# Allegro board board6DFfils6Fini.brd
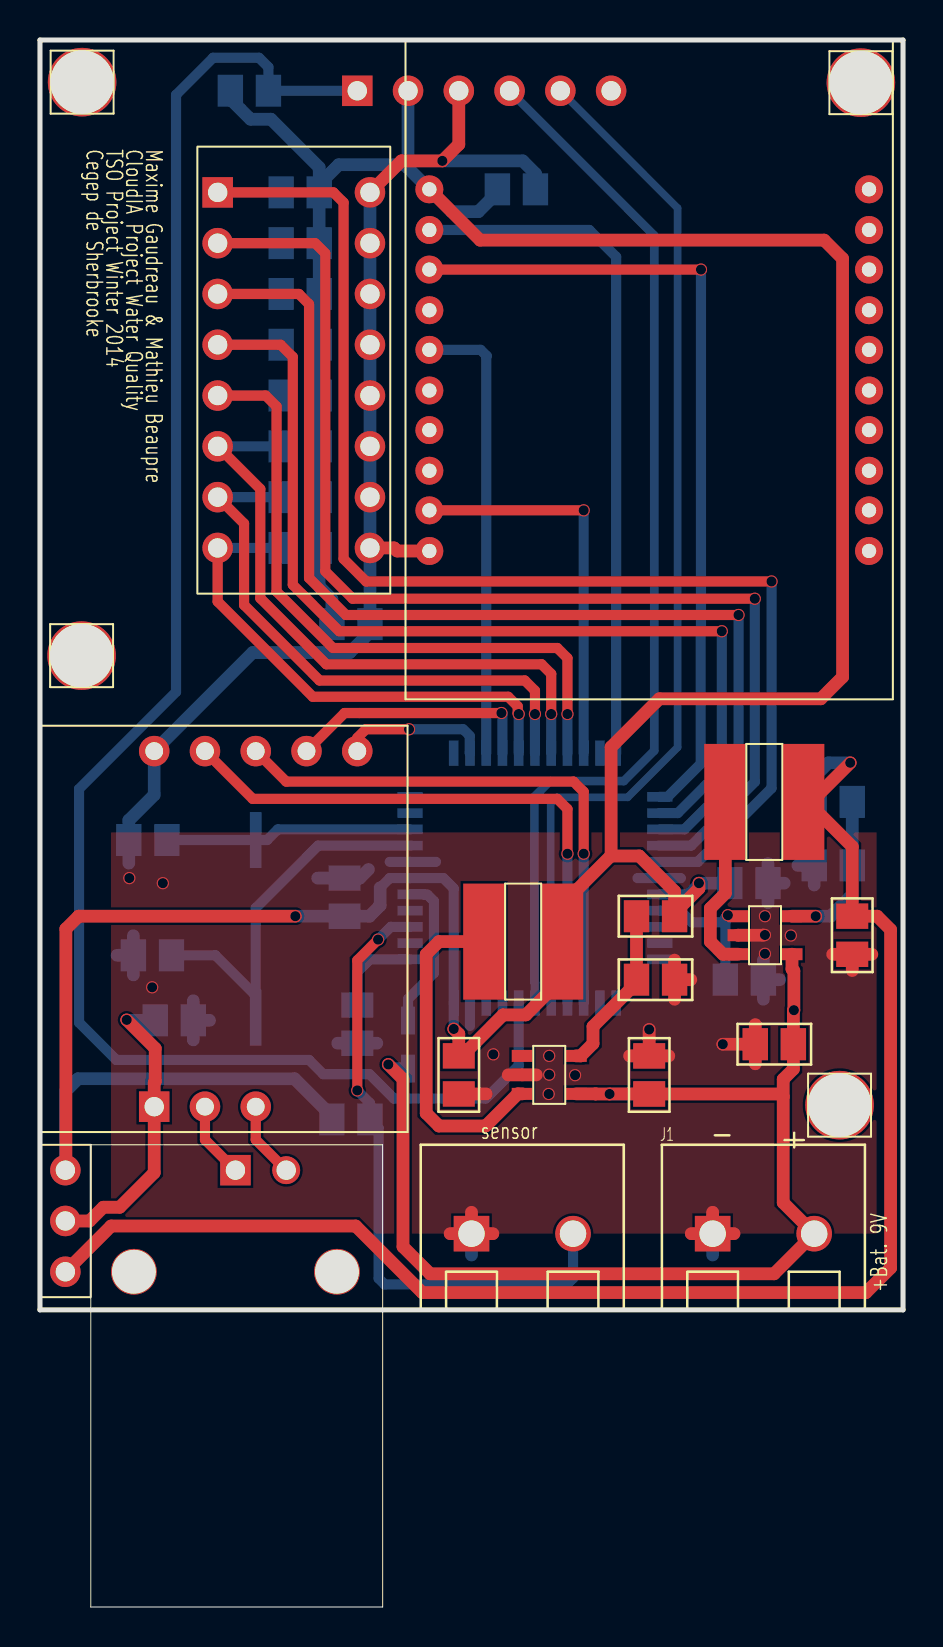
[diagram p0: board, top side]
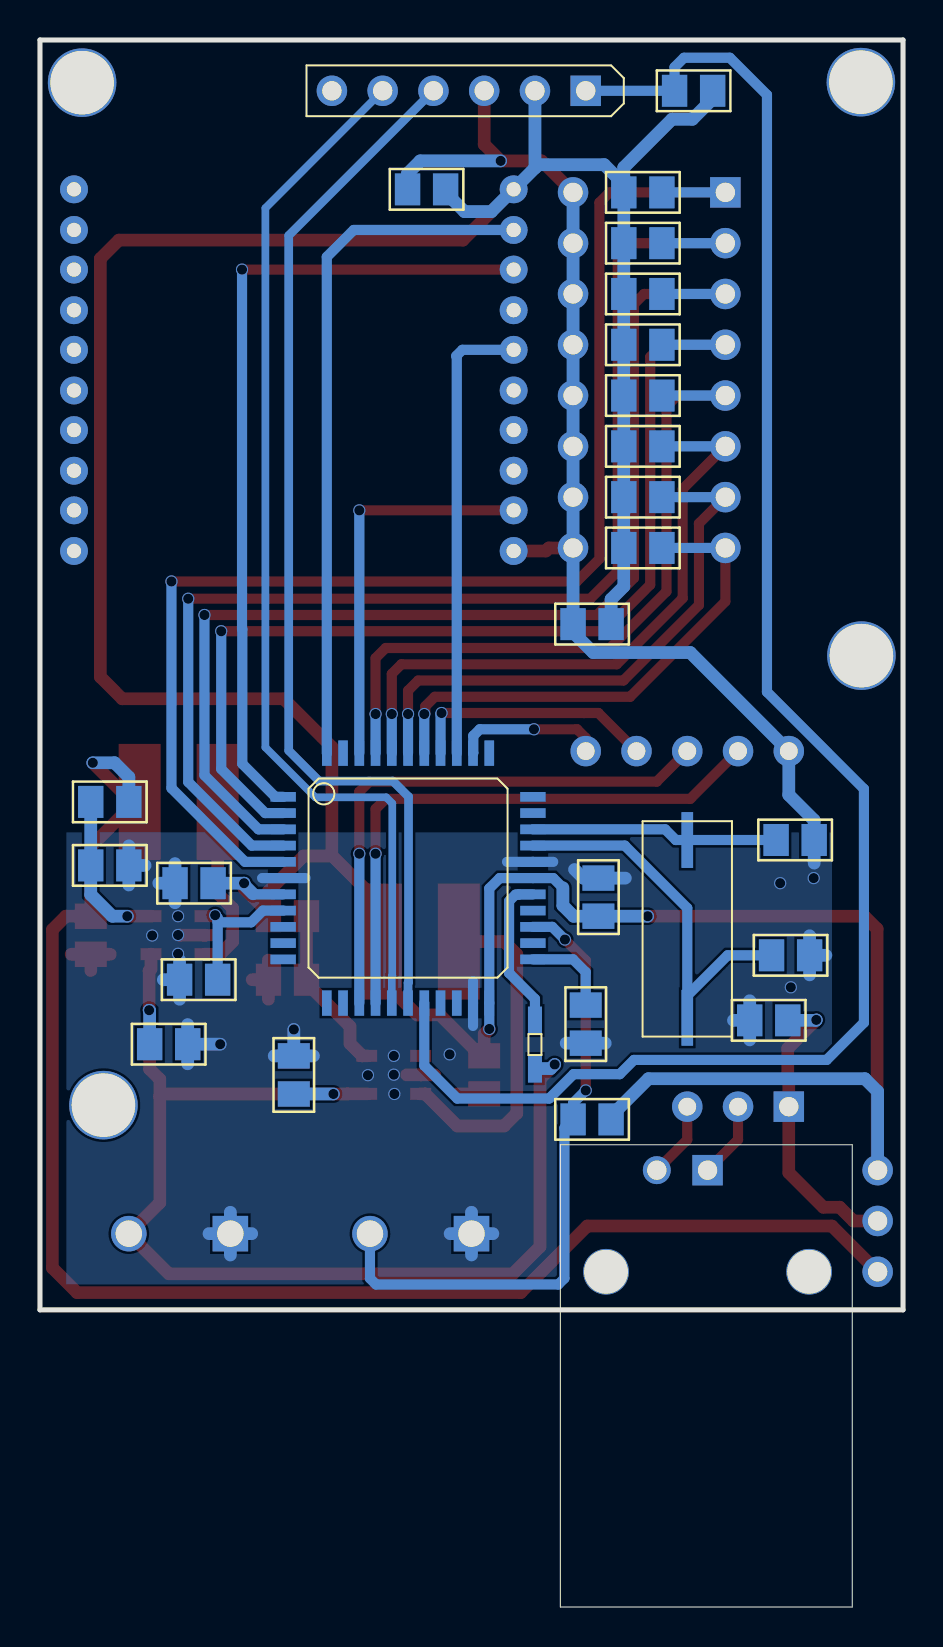
[diagram p1: board, bottom side, seen from below]

Outline 43.18 x 78.36 mm; copper layers: TOP, BOTTOM. Coordinates in mm from the lower left corner of the outline.
Outline path: 0,78.36 0,14.86 43.18,14.86 43.18,78.36 0,78.36

## Design rules (mm)
nets with their own width: min track width 0.381; nets N45221 N45265
nets with their own width: min track width 0.508; nets CAPTEURRX CAPTEURTX CELL7 CELL8 ENABLE POWER5V N45185 N45305 N56544 N56546 N56548 N56550 N56552 N56554 N56556 N56558 N61373 N61405 N78069 N78169 N81598 N94966 XBEEDIN XBEEDOUT XBEERESET XBEESLEEP
nets with their own width: min track width 0.635; nets 3.3V 5V 6A9V(PILE) GND N61433 N82912 N83047 N88127 N88155

## Placement (name value [footprint] x y rotation side)
3.3V  Vz 6V  [DIODESOD323]  18.41 26.92 90 bottom
+BAT. 9V  HEADER 2  [CONNECTEUR_2_200]  33.65 18.67 0 top
C1  10uF  [C_0805]  35.79 28.14 0 bottom
C2  100nF  [C_0805]  35.79 28.14 0 top
C3  10uF  [C_0805]  40.64 32.64 90 top
C4  10uF  [C_0805]  30.48 27.56 270 top
C5  100nF  [C_0805]  30.48 27.56 270 bottom
C6  22uF  [C_0805]  20.96 25.65 90 top
C7  10uF  [C_0805]  14.61 49.15 0 bottom
C8  100uF  [C_0805]  22.89 70.89 0 bottom
C9  27pF  [C_0805]  4.67 32.59 0 bottom
C10  27pF  [C_0805]  4.44 38.35 0 bottom
C11  10uF  [C_0805]  15.88 30.1 270 bottom
C12  0.1 uF  [C_0805]  15.24 34.54 90 bottom
C13  0.1 uF  [C_0805]  34.52 36.2 0 bottom
C14  10uF  [C_0805]  5.77 29.34 0 bottom
J2  HEADER 3  [JUMPER3]  1.27 16.76 90 top
J3  Convertion Board  [CONDUCTIVITY_SENSOR]  0 23.75 90 top
J4  BNC au capteur  [CONNECTEUR_BNC]  2.54 23.11 270 top
J6  Connecteur PicKit  [SIP6]  15.88 75.82 270 bottom
J7  contact eau  [CONNECTEUR_2_200]  21.59 18.67 0 top
L1  10uH  [BOBINE10U100MH]  34.29 40.26 0 top
L2  10uH  [BOBINE10U100MH]  22.23 33.27 0 top
NOREF  -  [unnamed]  2.08 47.57 270 top
NOREF#2  -  [unnamed]  2.11 76.25 270 top
NOREF#3  -  [unnamed]  40 25.1 270 top
NOREF#4  -  [unnamed]  41.07 76.23 270 top
R1  105K  [R_0805]  40.64 40.26 180 bottom
R2  ?  [R_0805]  36.2 31.37 180 bottom
R3  20K  [R_0805]  38.73 37.08 0 bottom
R4  61.9K  [R_0805]  29.84 34.54 0 top
R5  20K  [R_0805]  31.75 31.37 180 top
R6  4.7K  [R_0805]  9.53 75.82 0 bottom
R7  10K  [R_0805]  16.51 24.38 180 bottom
R8  10K  [R_0805]  12.07 70.74 0 bottom
R9  10K  [R_0805]  12.07 68.2 0 bottom
R10  10K  [R_0805]  12.07 65.66 0 bottom
R11  10K  [R_0805]  12.07 63.12 0 bottom
R12  10K  [R_0805]  12.07 60.58 0 bottom
R13  10K  [R_0805]  12.07 58.04 0 bottom
R14  10K  [R_0805]  12.07 55.5 0 bottom
R15  10K  [R_0805]  12.07 52.96 0 bottom
SW1  SW DIP-8  [DIPSWITCH]  8.89 70.74 0 top
U1  LM104/TO  [TPS560200]  34.92 34.54 0 top
U2  LM104/TO  [TPS560200]  24.13 27.56 0 top
U3  PIC18F47J13  [PQFP44]  24.77 36.45 180 bottom
U4  Xbee  [XBEE]  30.48 61.85 0 top
Y1  4Mhz CRYSTAL  [CRYSTAL_SMD]  10.79 33.91 270 bottom

## Library data of the parts
3.3V = DIODE ZENER
+BAT. 9V = HEADER 2_1
C1-C6 C14 = C
C7-C11 = CAPACITOR NON-POL
C12 C13 = CAP NP
J2 = HEADER 3
J3 = HEADER 3X2_3
J4 = BNC
J6 = HEADER 6_0
J7 = HEADER 2
L1 L2 = INDUCTOR
R1-R5 R7-R15 = R
R6 = RESISTOR
SW1 = SW DIP-8: User Part Number: ***
U1 U2 = LM104/TO_3
U3 = PIC16C67_2
U4 = HEADER 11X2_1
Y1 = CRYSTAL

## Footprints (pads in the part's own frame, mm; a bottom-side part is the same pattern mirrored in y, then rotated)
BOBINE10U100MH
  rect 2.1x5.8 smd: 1(0,0) 2(3.9,0)
C_0805
  rect 1.27x1.6 smd: 1(0,0) 2(1.905,0)
CONDUCTIVITY_SENSOR
  rect 1.524x1.524 hole 0.965: 1(1.27,-5.715)
  round 1.524 hole 0.889: 2(1.27,-8.255) 3(1.27,-10.795) 4(19.05,-5.715) 5(19.05,-8.255) 6(19.05,-10.795) 7(19.05,-13.335) 8(19.05,-15.875)
CONNECTEUR_2_200
  rect 1.778x1.778 hole 1.321: 1(0,0)
  round 1.778 hole 1.321: 2(5.08,0)
CONNECTEUR_BNC
  round 2.286 hole 2.184: (6.35,12.319) (6.35,2.159)
  rect 1.524x1.524 hole 0.965: 1(1.27,7.239)
  round 1.397 hole 0.965: 2(1.27,9.779)
CRYSTAL_SMD
  rect 2.794x0.584 smd: 1(-4.445,0) 2(4.445,0)
DIODESOD323
  rect 1.4x0.7 smd: 1(0,0) 2(2.4,0)
DIPSWITCH
  rect 1.524x1.524 hole 0.965: 1(0,0)
  round 1.524 hole 0.965: 2(0,-2.54) 3(0,-5.08) 4(0,-7.62) 5(0,-10.16) 6(0,-12.7) 7(0,-15.24) 8(0,-17.78) 9(7.62,-17.78) 10(7.62,-15.24) 11(7.62,-12.7) 12(7.62,-10.16) 13(7.62,-7.62) 14(7.62,-5.08) 15(7.62,-2.54) 16(7.62,0)
JUMPER3
  round 1.524 hole 0.965: 1(0,0) 2(2.54,0) 3(5.08,0)
PQFP44
  rect 1.27x0.483 smd: 1(-6.248,4.064) 2(-6.248,3.251) 3(-6.248,2.438) 4(-6.248,1.626) 5(-6.248,0.813) 6(-6.248,0) 7(-6.248,-0.813) 8(-6.248,-1.626) 9(-6.248,-2.438) 10(-6.248,-3.251) 11(-6.248,-4.064) 23(6.248,-4.064) 24(6.248,-3.251) 25(6.248,-2.438) 26(6.248,-1.626) 27(6.248,-0.813) 28(6.248,0) 29(6.248,0.813) 30(6.248,1.626) 31(6.248,2.438) 32(6.248,3.251) 33(6.248,4.064)
  rect 0.483x1.27 smd: 12(-4.064,-6.248) 13(-3.251,-6.248) 14(-2.438,-6.248) 15(-1.626,-6.248) 16(-0.813,-6.248) 17(0,-6.248) 18(0.813,-6.248) 19(1.626,-6.248) 20(2.438,-6.248) 21(3.251,-6.248) 22(4.064,-6.248) 34(4.064,6.248) 35(3.251,6.248) 36(2.438,6.248) 37(1.626,6.248) 38(0.813,6.248) 39(0,6.248) 40(-0.813,6.248) 41(-1.626,6.248) 42(-2.438,6.248) 43(-3.251,6.248) 44(-4.064,6.248)
R_0805
  rect 1.27x1.6 smd: 1(0,0) 2(1.905,0)
SIP6
  rect 1.524x1.524 hole 0.965: 1(0,0)
  round 1.524 hole 0.965: 2(0,-2.54) 3(0,-5.08) 4(0,-7.62) 5(0,-10.16) 6(0,-12.7)
TPS560200
  rect 1.05x0.6 smd: 1(0,0) 2(0,-0.95) 3(0,-1.9) 4(2.7,-1.9) 5(2.7,0)
unnamed
  round 3.429 hole 3.175: 1(0,0)
XBEE
  round 1.397 hole 0.711: 1(-10.998,9.042) 2(-10.998,7.01) 3(-10.998,5.029) 4(-10.998,2.997) 5(-10.998,1.016) 6(-10.998,-1.016) 7(-10.998,-2.997) 8(-10.998,-5.029) 9(-10.998,-7.01) 10(-10.998,-9.042) 11(10.998,-9.042) 12(10.998,-7.01) 13(10.998,-5.029) 14(10.998,-2.997) 15(10.998,-1.016) 16(10.998,1.016) 17(10.998,2.997) 18(10.998,5.029) 19(10.998,7.01) 20(10.998,9.042)

## Nets
3.3V: C6.2 C7.1 C8.1 C12.1 C13.1 J2.3 J6.2 L2.2 R4.2 R6.1 R7.2 R8.2 R9.2 R10.2 R11.2 R12.2 R13.2 R14.2 R15.2 U3.7(VDD1) U3.22(RA3) U3.28(VDD2) U4.1
5V: C3.2 J2.1 L1.2 R1.2
GND: +BAT. 9V.1 C1.1 C2.1 C3.1 C4.1 C5.1 C6.1 C7.2 C8.2 C9.1 C10.1 C11.2 C12.2 C13.2 C14.2 J3.4(GND) J6.3 J7.1 R2.1 R3.1 R5.1 SW1.9(B8) SW1.10(B7) SW1.11(B6) SW1.12(B5) SW1.13(B4) SW1.14(B3) SW1.15(B2) SW1.16(B1) U1.2(GND) U2.2(GND) U3.6(VSS1) U3.21(RA2) U3.29(VSS2) U4.10
6A9V(PILE): 3.3V.1(CATHODE) +BAT. 9V.2 C1.2 C2.2 C4.2 C5.2 U1.4(VIN) U2.4(VIN)
CAPTEURRX: J3.6 U3.14(RB4)
CAPTEURTX: J3.5 U3.15(RB5)
CELL7: J3.8 U3.35(RC1)
CELL8: J3.7 U3.37(RC3/SCL1)
ENABLE POWER5V: R2.2 U1.1(EN) U3.8(RB0)
XBEEDIN: U3.1(RC7) U4.3
XBEEDOUT: U3.44(RC6) U4.2
XBEERESET: U3.36(RC2) U4.5
XBEESLEEP: U3.42(RC4/SDA1/SDI) U4.9
N45185: C11.1 U3.23(VDDCORE)
N45221: J6.5 U3.16(RB6)
N45265: J6.4 U3.17(RB7)
N45305: J6.1 R6.2 U3.18(M\C\L\R\)
N56544: R8.1 SW1.1(A1) U3.5(RD7)
N56546: R9.1 SW1.2(A2) U3.4(RD6)
N56548: R10.1 SW1.3(A3) U3.3(RD5)
N56550: R11.1 SW1.4(A4) U3.2(RD4)
N56552: R12.1 SW1.5(A5) U3.41(RD3)
N56554: R13.1 SW1.6(A6) U3.40(RD2)
N56556: R14.1 SW1.7(A7) U3.39(RD1/SDA2)
N56558: R15.1 SW1.8(A8) U3.38(RD0/SCL2)
N61373: J3.2 J4.1(CENTER)
N61405: J3.3 J4.2(SHIELD)
N61433: C14.1 J2.2 J3.1
N78069: C9.2 U3.30(OSC1/RA7) Y1.2
N78169: C10.2 U3.31(OSC2/RA6) Y1.1
N81598: 3.3V.2(ANODE) U3.27(RE2)
N82912: R4.1 R5.2 U2.5(VSENSE)
N83047: L2.1 U2.3(PH)
N88127: R1.1 R3.2 U1.5(VSENSE)
N88155: L1.1 U1.3(PH)
N94966: J7.2 R7.1 U3.25(RE0)

Pads without a net: J6 6; NOREF 1; NOREF#2 1; NOREF#3 1; NOREF#4 1; U2 1; U3 9 10 11 12 13 19 20 24 26 32 33 34 43; U4 4 6 7 8 11 12 13 14 15 16 17 18 19 20

## Via types
v1: diameter 0.61, hole 0.508, TOP to BOTTOM, 41 vias

## Routing (per net, layer and track width the routed paths; a pad name or vN(x,y) marks a point on that pad's centre or on a via; arc(x,y) is an arc through that point)
3.3V: length 190.7
  TOP w0.635: R4.2 31.75,34.71 ; 31.75,34.71 32.97,35.93 v1(32.97,36.2) ; 31.75,34.71 31.75,35.79 29.98,37.56 28.56,37.56 ; v1(12.78,34.54) 1.93,34.54 1.3,33.91 1.3,21.87 J2.3 ; 28.56,37.56 28.57,37.57 28.57,43 30.99,45.42 39.07,45.42 40.16,46.51 40.16,67.43 39.23,68.35 22.02,68.35 U4.1 ; 28.56,37.56 26.12,35.12 L2.2 26.12,31.42 24.31,29.61 23.17,29.61 21.12,27.56 C6.2 20.96,28.65 v1(20.7,28.91)
  BOTTOM w0.508: 17.02,35.97 17.5,36.45 U3.28 20.18,36.45 20.7,35.93 U3.22 v1(20.7,28.91) ; U3.7 32.49,35.64 32.52,35.67
  BOTTOM w0.635: R7.2 14.61,24.55 12.74,26.42 1.91,26.42 1.27,25.78 J2.3 ; C13.1 v1(32.97,36.2) 32.97,36.11 32.52,35.67 ; J6.2 18.41,71.96 ; 18.41,71.96 U4.1 20.6,69.78 21.94,69.78 22.89,70.73 C8.1 ; 18.41,71.96 18.25,72.12 14.95,72.12 13.97,71.15 ; v1(12.78,34.54) C12.1 16.48,34.54 17.02,35.08 17.02,35.97 ; R6.1 9.53,75.41 10.54,74.4 11.56,74.4 13.97,71.98 13.97,71.15 ; 13.97,71.15 R8.2 R9.2 R10.2 R11.2 R12.2 R13.2 R14.2 R15.2 13.97,51.03 14.61,50.39 C7.1
5V: length 76.4
  TOP w0.635: 38.4,40.26 38.58,40.26 v1(40.54,42.21) ; 38.4,40.26 L1.2 ; 38.4,40.26 40.64,38.02 C3.2 41.88,34.54 42.56,33.87 42.56,16.96 41.33,15.72 19.13,15.72 15.8,19.05 3.56,19.05 J2.1
  BOTTOM w0.635: R1.2 38.73,41.5 39.45,42.21 v1(40.54,42.21)
GND: length 121.7
  TOP w0.635: 39.66,32.64 C3.1 ; C3.1 40.64,31.83 ; C3.1 41.62,32.64 ; 23.43,26.61 U2.2 24.83,26.61 ; 29.5,27.56 C4.1 ; C4.1 v1(30.48,28.88) ; C4.1 31.46,27.56 ; R5.1 31.75,32.35 ; R5.1 31.75,30.39 ; R5.1 32.56,31.37 ; J7.1 21.59,19.74 ; J7.1 20.52,18.67 ; J7.1 22.66,18.67 ; C2.1 35.79,29.12 ; C2.1 35.79,27.16 ; C2.1 v1(34.16,28.14) ; SW1.16 18.08,72.31 v1(20.13,72.31) 20.96,73.14 J6.3 ; 36.2,33.6 36.18,33.59 U1.2 ; +BAT. 9V.1 34.72,18.67 ; +BAT. 9V.1 32.59,18.67 ; +BAT. 9V.1 33.65,19.74 ; C6.1 22.33,25.65 ; U4.10 17.87,52.81 17.72,52.96 SW1.9
  BOTTOM w0.508: 19.81,37.26 U3.29 17.5,37.26 ; 32.07,36.45 U3.6 29.9,36.45 ; 21.51,29.06 U3.21 21.51,31.29
  BOTTOM w0.635: 7.67,28.36 C14.2 ; C14.2 7.67,30.32 ; C14.2 8.48,29.34 ; 32.59,18.67 +BAT. 9V.1 ; +BAT. 9V.1 33.65,17.6 ; +BAT. 9V.1 33.65,19.74 ; +BAT. 9V.1 34.72,18.67 ; J7.1 22.66,18.67 ; J7.1 21.59,19.74 ; J7.1 21.59,17.6 ; J7.1 20.52,18.67 ; C13.2 36.42,37.17 ; C13.2 36.42,35.22 ; C13.2 37.24,36.2 ; 14.9,28.19 C11.2 16.85,28.19 ; R3.1 38.73,38.06 ; R3.1 37.92,37.08 ; R3.1 38.73,36.11 ; R2.1 37.01,31.37 ; R2.1 36.2,32.35 ; R2.1 36.2,30.39 ; C8.2 24.79,71.68 24.16,72.31 v1(20.13,72.31) ; 16.43,36.88 16,36.45 C12.2 13.89,36.45 ; 4.44,37.2 C10.1 4.44,39.34 5.71,40.61 J3.4 10.64,47.73 15.5,47.73 16.51,48.74 C7.2 SW1.9 SW1.10 SW1.11 SW1.12 SW1.13 SW1.14 SW1.15 SW1.16 ; C9.1 4.67,31.61 ; C9.1 3.86,32.59 ; C9.1 4.67,33.57 ; C2.1 35.79,29.12 ; C2.1 v1(34.16,28.14) ; C2.1 35.79,27.16 ; 29.5,27.56 C4.1 ; C4.1 v1(30.48,28.88) ; C4.1 31.46,27.56
  vias: v1(4.47,36.45) v1(5.61,30.99) v1(6.15,36.2) v1(22.68,27.64) v1(25.48,27.56) v1(25.48,26.62) v1(25.45,25.65) v1(26.77,26.59) v1(36.27,34.54) v1(36.27,33.6) v1(36.27,32.66) v1(37.57,33.58)
6A9V(PILE): length 61.4
  TOP w0.635: 37.19,25.52 37.19,20.22 +BAT. 9V.2 36.73,16.66 19.52,16.66 18.16,18.01 18.16,26.39 v1(17.43,27.13) ; 37.19,25.52 37.05,25.65 C4.2 v1(28.5,25.65) 27.8,25.65 27.8,25.66 U2.4 ; 37.19,25.52 37.19,26.39 37.69,26.9 C2.2 37.69,29.82 v1(37.72,29.84) 37.72,31.81 37.63,31.9 U1.4
  BOTTOM w0.635: 3.3V.1 17.63,26.92 v1(17.43,27.13) ; C4.2 v1(28.5,25.65) ; v1(37.72,29.84) 37.69,29.82 C2.2
CAPTEURRX: length 27.8
  TOP w0.508: v1(27.2,37.67) 27.2,40.77 26.7,41.28 12.32,41.28 J3.6
  BOTTOM w0.508: v1(27.2,37.67) U3.14
CAPTEURTX: length 29
  TOP w0.508: v1(26.39,37.67) 26.39,39.9 25.88,40.41 10.64,40.41 J3.5
  BOTTOM w0.508: v1(26.39,37.67) U3.15
CELL7: length 7.5
  TOP w0.508: J3.8 15.88,43.46 16.31,43.89 v1(18.47,43.89)
  BOTTOM w0.508: U3.35 21.5,42.71 21.5,43.56 21.17,43.89 v1(18.47,43.89)
CELL8: length 12.6
  TOP w0.508: J3.7 15.24,44.7 15.97,44.7 v1(23.09,44.7)
  BOTTOM w0.508: v1(23.09,44.7) 23.14,44.65 U3.37
ENABLE POWER5V: length 7.3
  TOP w0.508: v1(34.42,34.59) 34.47,34.54 U1.1
  BOTTOM w0.508: 34.29,34.24 R2.2 ; 34.29,34.24 32.61,34.24 32.03,34.82 U3.8 ; 34.29,34.24 34.29,34.47 v1(34.42,34.59)
XBEEDIN: length 41
  TOP w0.508: U4.3 v1(33.07,66.88)
  BOTTOM w0.508: U3.1 31.41,40.51 33.06,42.16 33.06,48.89 33.07,48.9 v1(33.07,66.88)
XBEEDOUT: length 34.7
  BOTTOM w0.508: U3.44 28.83,67.51 27.48,68.86 U4.2
XBEERESET: length 22.9
  BOTTOM w0.508: U4.5 22.05,62.86 22.35,62.56 22.33,62.53 U3.36
XBEESLEEP: length 19.9
  TOP w0.508: U4.9 v1(27.2,54.84)
  BOTTOM w0.508: v1(27.2,54.84) U3.42
N45185: length 4.6
  BOTTOM w0.508: C11.1 15.88,31.75 16.51,32.39 U3.23
N45221: length 52.8
  BOTTOM w0.381: J6.5 31.9,69.95 31.9,42.99 29.4,40.49 25.86,40.49 25.55,40.18 25.55,31.58 25.58,31.55 U3.16
N45265: length 53.3
  BOTTOM w0.432: U3.17 24.77,31.22 24.74,31.24 24.74,40.52 25.52,41.3 29.21,41.3 30.73,42.82 30.73,68.58 J6.4
N45305: length 87
  BOTTOM w0.508: U3.18 23.95,27.08 22.3,25.43 17.7,25.43 16.48,26.64 14.17,26.64 13.46,27.36 3.82,27.36 1.96,29.22 1.96,40.91 6.81,45.76 6.81,75.62 8.66,77.47 10.96,77.47 11.43,77 R6.2 J6.1
N56544: length 66.8
  TOP w0.508: SW1.1 14.68,70.74 15.19,70.23 15.19,52.41 16.32,51.28 v1(36.6,51.28)
  BOTTOM w0.508: U3.5 32.92,37.26 36.6,40.94 v1(36.6,51.28) ; SW1.1 R8.1
N56546: length 62
  TOP w0.508: v1(35.76,50.42) 15.65,50.42 14.27,51.79 14.27,67.69 13.77,68.2 SW1.2
  BOTTOM w0.508: R9.1 SW1.2 ; U3.4 32.58,38.07 35.76,41.26 v1(35.76,50.42)
N56548: length 57
  TOP w0.508: SW1.3 12.95,65.66 13.46,65.15 13.46,51.45 15.31,49.61 v1(34.95,49.61)
  BOTTOM w0.508: U3.3 32.24,38.89 34.95,41.59 v1(34.95,49.61) ; R10.1 SW1.3
N56550: length 51.9
  TOP w0.508: v1(34.11,48.79) 14.97,48.79 12.65,51.12 12.65,62.51 12.04,63.12 SW1.4
  BOTTOM w0.508: v1(34.11,48.79) 34.11,41.9 31.91,39.7 U3.2 ; R11.1 SW1.4
N56552: length 36.3
  TOP w0.508: v1(26.39,44.65) 26.39,47.45 25.88,47.96 14.66,47.96 11.84,50.78 11.84,60.04 11.29,60.58 SW1.5
  BOTTOM w0.508: v1(26.39,44.65) U3.41 ; R12.1 SW1.5
N56554: length 31.7
  TOP w0.508: v1(25.58,44.65) 25.58,46.66 25.1,47.14 14.32,47.14 11.02,50.44 11.02,55.91 SW1.6
  BOTTOM w0.508: U3.40 v1(25.58,44.65) ; R13.1 SW1.6
N56556: length 28.6
  TOP w0.508: v1(24.77,44.65) 24.77,45.82 24.26,46.33 13.99,46.33 10.21,50.11 10.21,54.18 SW1.7
  BOTTOM w0.508: R14.1 SW1.7 ; U3.39 v1(24.77,44.65)
N56558: length 25.4
  TOP w0.508: v1(23.95,44.65) 23.9,44.7 23.9,45.04 23.43,45.52 13.65,45.52 8.89,50.28 SW1.8
  BOTTOM w0.508: SW1.8 R15.1 ; U3.38 v1(23.95,44.65)
N61373: length 3.8
  TOP w0.508: J4.1 8.26,23.37 J3.2
N61405: length 3.8
  TOP w0.508: J4.2 10.79,23.37 J3.3
N61433: length 15.1
  TOP w0.635: J2.2 2.48,19.3 3.17,19.99 3.99,19.99 5.71,21.72 J3.1 5.71,26.23 5.77,26.28 5.77,27.93 v1(4.34,29.36)
  BOTTOM w0.635: v1(4.34,29.36) 4.36,29.34 C14.1
N78069: length 19.6
  BOTTOM w0.508: U3.30 13.92,38.07 10.79,34.95 10.79,30.57 ; 10.79,30.57 Y1.2 ; 10.79,30.57 8.78,32.59 C9.2
N78169: length 12.4
  BOTTOM w0.508: C10.2 Y1.1 11.37,38.35 11.9,38.89 U3.31
N81598: length 7.8
  BOTTOM w0.508: U3.27 19.23,35.64 19.24,35.62 19.38,35.62 19.71,35.3 19.71,31.7 18.41,30.41 3.3V.2
N82912: length 8.4
  TOP w0.635: R4.1 R5.2 29.84,31.2 27.67,29.03 27.67,28.17 27.06,27.56 U2.5
N83047: length 16.8
  TOP w0.635: L2.1 19.96,33.27 19.32,32.64 19.32,24.69 19.96,24.05 22.3,24.05 23.9,25.66 U2.3
N88127: length 8.1
  TOP w0.635: U1.5 v1(38.81,34.54)
  BOTTOM w0.635: v1(38.81,34.54) 39.56,34.54 40.64,35.62 R3.2 R1.1
N88155: length 8.9
  TOP w0.635: L1.1 34.29,35.69 33.54,34.94 33.54,33.27 34.17,32.64 U1.3
N94966: length 31.9
  TOP w0.508: v1(16.92,33.38) 15.88,32.33 v1(15.88,25.83)
  BOTTOM w0.508: v1(16.92,33.38) 17.55,34.01 U3.25 ; J7.2 26.67,16.43 26.37,16.13 17.25,16.13 16.94,16.43 16.94,23.95 R7.1 16.51,25.2 v1(15.88,25.83)

## Copper pours and planes (outline as drawn; the poured copper is in the pictures)
GND on TOP: 3.56,38.73 3.56,18.67 41.86,18.67 41.86,38.73
GND on BOTTOM: 3.56,38.73 3.56,16.13 41.86,16.13 41.86,38.73 ; 1 cut-out

## Text on the board
Ref Des/Silkscreen Top: J1 | sensor | +Bat. 9V | Cegep de Sherbrooke | TSO Project Winter 2014 | CloudIA Project Water Quality | Maxime Gaudreau & Mathieu Beaupre | - | +
NCLEGEND-1-2: FIGURE | SIZE | 20.0 | 28.0 | 35.0 | 38.0 | 52.0 | 86.0 | 125.0 | DRILL CHART: TOP to BOTTOM | ALL UNITS ARE IN MILS | PLATED | QTY | 41 | 20 | 7 | 1 | 27 | 2 | 4
